# Altium PCB PCB1.PcbDoc
Units mm, origin at the board's own origin, x right, y up, seen from the top; angles counter-clockwise.
Board outline 100.25 x 100.25 mm, 2 copper layers (Top Layer, Bottom Layer); 86 components, 81 nets, 277 pads, 157 vias.
Unrouted connection lines stored in the file: 107.
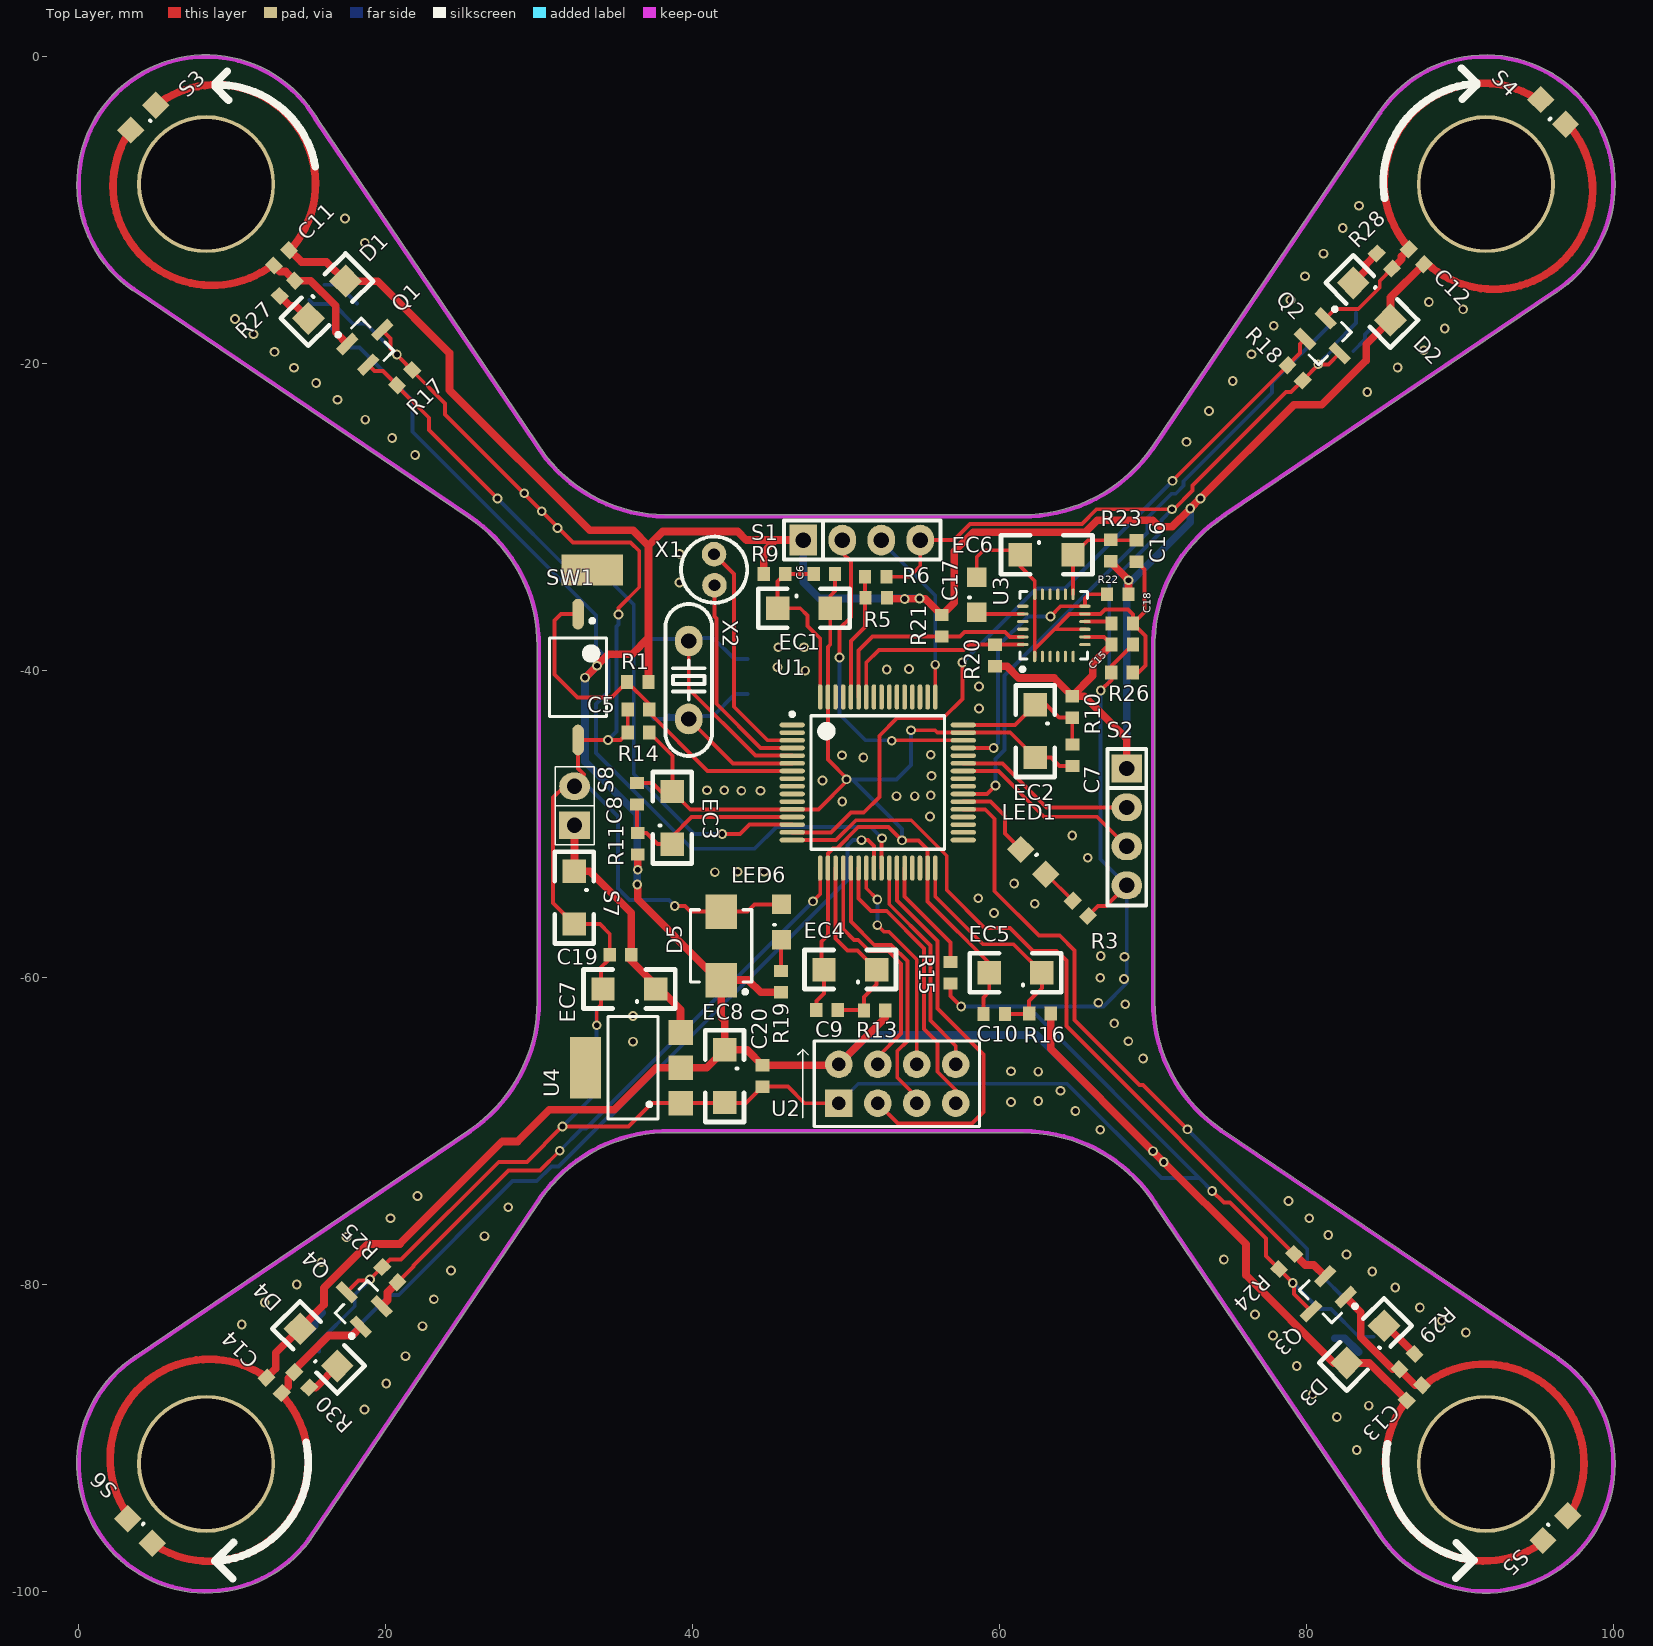
[diagram p0: Top Layer view]
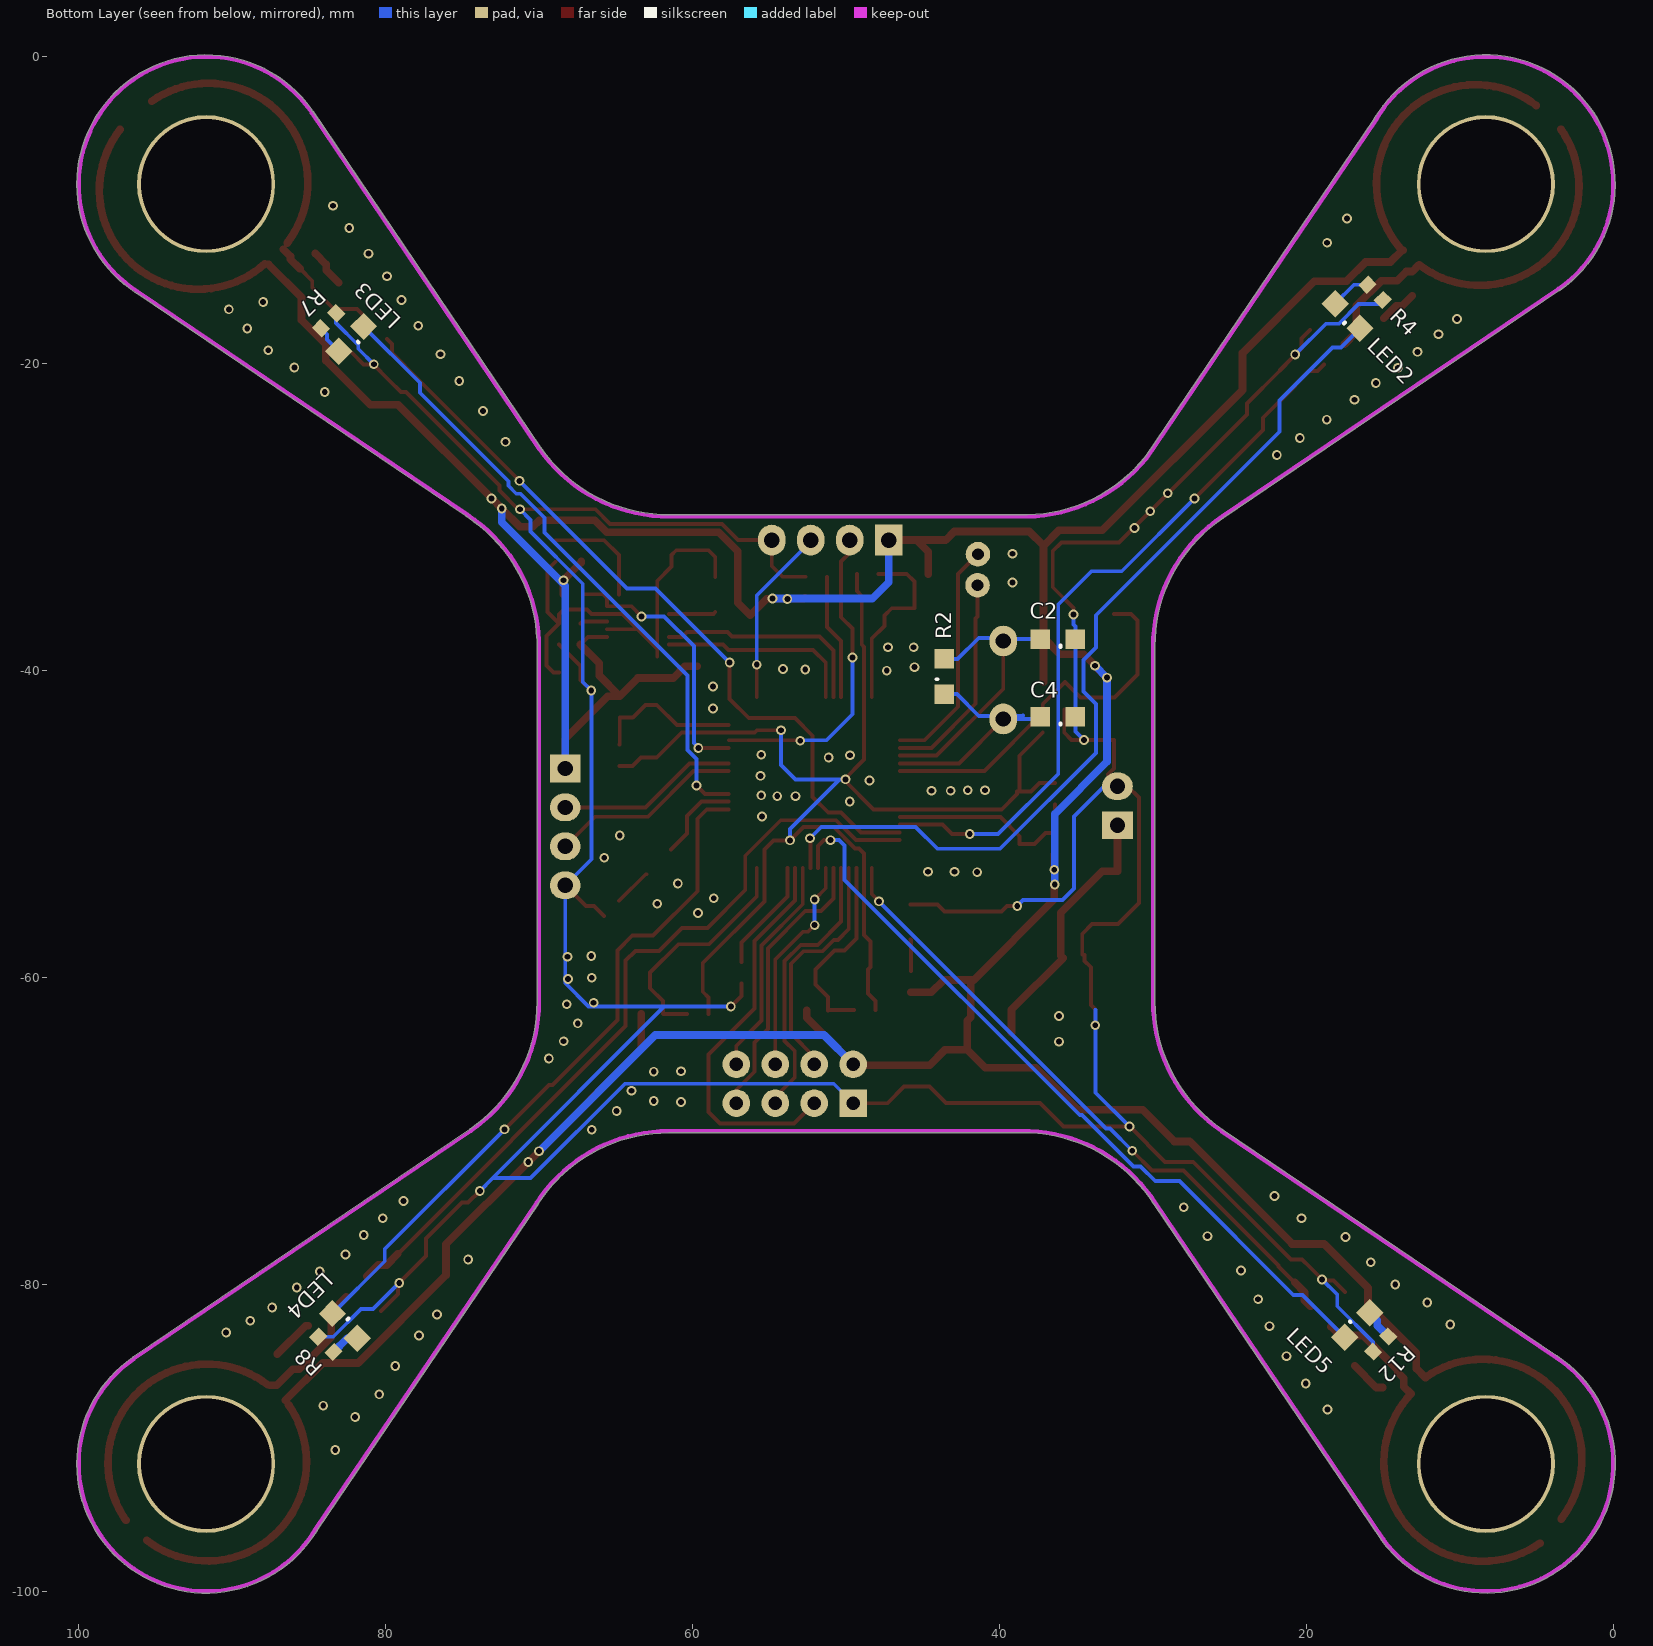
[diagram p1: Bottom Layer view, seen from below]

## Layer stack, top to bottom
Top Solder: solder mask 0.0102, Solder Resist, Dk 3.5
Top Layer: signal copper 0.0356
Dielectric1: dielectric 0.32, FR-4, Dk 4.8
Bottom Layer: signal copper 0.0356
Bottom Solder: solder mask 0.0102, Solder Resist, Dk 3.5

## Board outline
3.634,-84.682 ccw(c8.3,-91.7) 15.091,-96.69 ccw(c14.988,-96.615) 15.113,-96.641 29.915,-74.782 ccw(c29.833,-74.685) 29.94,-74.754 cw(c38.43,-80.223) 38.53,-70.124 ccw(c38.557,-70) 38.557,-70.127 61.519,-70.127 ccw(c61.544,-70.003) 61.545,-70.13 cw(c61.58,-80.229) 70.061,-74.747 ccw(c70.168,-74.678) 70.064,-74.751 84.458,-96 ccw(c84.581,-95.968) 84.472,-96.033 ccw(c91.7,-91.7) 100.127,-91.7 ccw(c91.7,-91.7) 96.501,-84.774 ccw(c96.391,-84.838) 96.463,-84.733 74.54,-69.915 ccw(c74.446,-70) 74.518,-69.895 cw(c80.227,-61.565) 70.128,-61.594 ccw(c70.001,-61.595) 70.127,-61.583 70.127,-38.613 ccw(c70.004,-38.582) 70.131,-38.582 ccw(c70.004,-38.582) 70.131,-38.581 cw(c80.229,-38.43) 74.733,-29.958 ccw(c74.663,-29.851) 74.762,-29.932 96.218,-15.413 ccw(c96.161,-15.299) 96.23,-15.407 ccw(c91.7,-8.3) 100.127,-8.3 ccw(c91.7,-8.3) 84.838,-3.408 ccw(c84.941,-3.482) 84.821,-3.524 ccw(c84.831,-3.651) 84.725,-3.58 69.937,-25.433 ccw(c69.991,-25.548) 69.886,-25.476 cw(c61.57,-19.746) 61.515,-29.845 ccw(c61.514,-29.972) 61.49,-29.847 38.775,-29.847 ccw(c38.747,-29.971) 38.743,-29.844 cw(c38.379,-19.752) 30.532,-26.108 ccw(c30.433,-26.188) 30.498,-26.079 15.573,-4.047 ccw(c15.454,-4.091) 15.564,-4.027 ccw(c8.3,-8.3) 3.484,-15.216 ccw(c3.557,-15.111) 3.52,-15.233 25.389,-30.033 ccw(c25.472,-29.937) 25.401,-30.043 cw(c19.777,-38.43) 29.876,-38.428 ccw(c30,-38.456) 29.873,-38.456 29.873,-61.519 ccw(c29.997,-61.544) 29.87,-61.545 cw(c19.771,-61.57) 29.87,-61.57 cw(c19.771,-61.57) 25.47,-69.907 ccw(c25.542,-70.012) 25.448,-69.926 3.656,-84.67 ccw(c3.704,-84.788)

## Design rules (kind name [scope] priority, off if disabled: settings)
Clearance [All] p1: gap=0.152
PolygonConnect [All] p1: connectstyle=Relief reliefconductorwidth=0.254 reliefentries=4 polygonreliefangle="90 Angle" airgapwidth=0.254
RoutingVias [All] p1: holewidth=0.711 width=1.27 viastyle="Through Hole" minholewidth=0.711 minwidth=1.27 maxholewidth=0.711 maxwidth=1.27
SilkToSolderMaskClearance SilkscreenOverComponentPads [IsPad] p1: minsilkscreentomaskgap=0.254 clearancetoexposedcopper=TRUE
SolderMaskExpansion [All] p1: expansion=0.102
Width Width_VCC [InNet('VCC' ,'BAT')] p1: maxlimit=0.7 minlimit=0.5 preferedwidth=0.5 minimp=50.000000 maximp=50.000000 favimp=50.000000
Width Width_ALL [All] p2: maxlimit=0.7 minlimit=0.254 preferedwidth=0.254 minimp=50.000000 maximp=50.000000 favimp=50.000000
28 further rules are at their usual default settings.

## Components (designator, comment, footprint, x,y, rotation, side; value= is the part's Value field where it differs from the comment)
C2 "22pF" 0805 36.22,-37.922 r0 bottom
C4 "22pF" 0805 36.22,-42.977 r0 bottom
C5 "104" 0603 36.474,-42.545 r180 top
C6 "104" 0603 48.59,-33.706 r0 top
C7 "104" 0603 64.77,-45.517 r270 top
C8 "104" 0603 36.373,-48.031 r90 top
C9 "104" 0603 48.768,-62.128 r180 top
C10 "104" 0603 59.665,-62.382 r180 top
C11 "104" 0603 13.208,-13.106 r45 top
C12 "104" 0603 87.173,-13.03 r315 top
C13 "104" 0603 87.046,-87.071 r225 top
C14 "104" 0603 12.725,-86.589 r135 top
C15 "104" 0603 68.007,-38.303 r0 top
C16 "106" 0603 68.936,-32.207 r90 top
C17 "104" 0805 58.547,-35.027 r90 top
C18 "104" 0603 68.007,-36.932 r0 top
C19 "104" 0603 35.306,-58.522 r180 top
C20 "104" 0603 44.552,-66.421 r270 top
D1 "IN4148" 1206 14.961,-17.043 r45 top
D2 "IN4148" 1206 83.058,-14.732 r315 top
D3 "IN4148" 1206 85.065,-82.702 r225 top
D4 "IN4148" 1206 16.84,-85.319 r135 top
D5 "SMBJ5.0A" DIOM4436X23N 41.859,-57.937 r270 top
EC1 "10uf" 1206 45.542,-35.941 r0 top
EC2 "10uf" 1206 62.332,-42.24 r270 top
EC3 "10uf" 1206 38.684,-51.308 r90 top
EC4 "10uf" 1206 51.994,-59.487 r180 top
EC5 "10uf" 1206 62.763,-59.69 r180 top
EC6 "10uF" 1206 61.366,-32.461 r0 top
EC7 "10uf" 1206 37.592,-60.757 r180 top
EC8 "10uf" 1206 42.088,-64.719 r270 top
LED1 "LED" 0805 62.205,-52.502 r315 top
LED2 "LED" 0805 17.31,-16.856 r45 bottom
LED3 "LED" 0805 82.288,-18.384 r315 bottom
LED4 "LED" 0805 82.659,-82.749 r225 bottom
LED5 "LED" 0805 16.642,-82.651 r135 bottom
LED6 "LED" 0805 45.822,-56.363 r90 top
Q1 "AO3416" SOT-23_N 18.974,-18.593 r45 top
Q2 "MOSFET-N" SOT-23_N 81.382,-18.517 r315 top
Q3 "MOSFET-N" SOT-23_N 81.102,-80.95 r225 top
Q4 "MOSFET-N" SOT-23_N 18.263,-81.305 r135 top
R1 "10K" 0603 36.424,-40.742 r0 top
R2 "RES" 0805 43.561,-40.361 r90 bottom
R3 "1K" 0603 65.278,-55.499 r315 top
R4 "1K" 0603 15.514,-15.347 r225 bottom
R5 "0R" 0603 51.968,-35.255 r0 top
R6 "20K" 0603 51.943,-33.884 r0 top
R7 "1K" 0603 83.724,-17.201 r135 bottom
R8 "1K" 0603 83.897,-83.916 r45 bottom
R9 "0R" 0603 45.339,-33.706 r0 top
R10 "0R" 0603 64.745,-42.367 r270 top
R11 "0R" 0603 36.424,-51.283 r90 top
R12 "1K" 0603 15.152,-83.889 r315 bottom
R13 "0R" 0603 51.867,-62.154 r180 top
R14 "0R" 0603 36.474,-44.044 r180 top
R15 "0R" 0603 56.82,-59.69 r90 top
R16 "0R" 0603 62.636,-62.357 r180 top
R17 "20K" 0603 21.234,-20.904 r45 top
R18 "20K" 0603 79.273,-20.599 r315 top
R19 "1K" 0603 45.771,-60.274 r90 top
R20 "3K" 0603 59.715,-39.014 r270 top
R21 "3K" 0603 56.236,-37.084 r90 top
R22 "3K" 0603 67.716,-35.027 r0 top
R23 "0R" 0603 67.259,-32.182 r270 top
R24 "20K" 0603 78.715,-78.511 r225 top
R25 "20K" 0603 20.269,-79.375 r135 top
R26 "0R" 0603 67.996,-40.132 r180 top
R27 "1K" 0603 13.589,-15.088 r225 top
R28 "1K" 0603 85.09,-13.31 r135 top
R29 "1K" 0603 86.563,-85.039 r45 top
R30 "1K" 0603 14.529,-86.233 r315 top
S1 "CON4" SIP4 47.219,-31.496 r0 top
S2 "CON4" SIP4 68.301,-46.38 r270 top
S3 "M0" 0805 4.166,-3.962 r225 top
S4 "M1" 0805 96.088,-3.556 r135 top
S5 "M2" 0805 96.266,-95.885 r45 top
S6 "M3" 0805 3.988,-96.114 r315 top
S7 "CON2" 1206 32.283,-53.086 r270 top
S8 "CON2" SIP2 32.309,-50.089 r90 top
SW1 "KEY2" SSOP2N 32.537,-40.437 r270 top
U1 "STM32F103RBT6" TSQFP50P1200X1200X160-64N 52.07,-47.295 r0 top
U2 "NRF24L01" CN8 49.53,-68.199 r90 top
U3 "MPU6050" QFN50P400X400X95_HS-25N 63.551,-37.059 r90 top
U4 "AMS1117" SOT223 36.119,-65.888 r90 top
X1 "32.768KHz" XTAL-50-2 41.427,-34.442 r90 top
X2 "8MHz" XTAL-200 39.751,-43.155 r90 top

## Footprints (in the part's own frame and the unit in brackets; to place one, negate y for a bottom-side part, rotate by r counter-clockwise, add the part's x,y. Pads: shape width x height; smd on the part's side, far side on the other; paste and mask are expansions set on the pad)
0603 [mm] "Chip Inductor, Body 0.6x0.3mm, IPC High Density"
  rect 0.8x0.9 smd: 1(-0.7,0) 2(0.7,0)
  body extent -0.87,-0.48 0.87,0.48, height 1.3
0805 [mil] "Chip Resistor; Body 2.0 x 1.3 mm (LxW typ)"
  rect 50x50 smd: 1(-46,1) 2(44,1)
  silkscreen extent -8,18 -8,21
1206 [mil]
  rect 60x60 smd: 1(0,0) 2(135,0)
  silkscreen extent -50,-50 185,50
CN8 [mm] "CN?"
  rect 1.8x1.8 hole 0.9: 1(0,0)
  round 1.8 hole 0.9: 2(2.54,0) 3(0,-2.54) 4(2.54,-2.54) 5(0,-5.08) 6(2.54,-5.08) 7(0,-7.62) 8(2.54,-7.62)
  silkscreen extent -1.52,-9.17 4.06,2.68
DIOM4436X23N [mm] "Molded Diode, 2-Leads, Body 4.4x3.6mm, IPC Medium Density"
  rect 2.25x2.05 smd: 1(-2.233,0) 2(2.233,0)
  silkscreen extent -2.35,-2 3.12,2, body extent -2.35,-1.97 2.35,1.97, height 2.3
QFN50P400X400X95_HS-25N [mm] "QFN, 24-Leads, Body 4.00x4.00mm, Pitch 0.50mm, Thermal Pad 2.68x2.60mm, IPC Medium Density"
  oval 0.75x0.2 smd: 1(-2.025,1.25) 2(-2.025,0.75) 3(-2.025,0.25) 4(-2.025,-0.25) 5(-2.025,-0.75) 6(-2.025,-1.25) 13(2.025,-1.25) 14(2.025,-0.75) 15(2.025,-0.25) 16(2.025,0.25) 17(2.025,0.75) 18(2.025,1.25)
  oval 0.2x0.75 smd: 7(-1.25,-2.025) 8(-0.75,-2.025) 9(-0.25,-2.025) 10(0.25,-2.025) 11(0.75,-2.025) 12(1.25,-2.025) 19(1.25,2.025) 20(0.75,2.025) 21(0.25,2.025) 22(-0.25,2.025) 23(-0.75,2.025) 24(-1.25,2.025)
  silkscreen extent -2.97,-2.2 2.2,2.2, body extent -2.05,-2.05 2.05,2.05, height 0.95
SIP2 [mm]
  rect 1.8x2 hole 1: 1(0,0)
  oval 1.8x2 hole 1: 2(2.54,0)
  silkscreen extent -1.27,-1.27 3.81,1.27
SIP4 [mm]
  rect 1.8x2 hole 1: 1(0,0)
  oval 1.8x2 hole 1: 2(2.54,0) 3(5.08,0) 4(7.62,0)
  silkscreen extent -1.27,-1.27 8.94,1.27
SOT223 [mm] "SOT-223/SC-73; 4 Leads; Body 6.7 x 7.3 mm, inc. leads (LxW max)"
  rect 1.6x1.6 smd: 1(-2.3,-3.1) 2(0,-3.1) 3(2.3,-3.1)
  rect 4x2 smd: 4(0,3.1)
  silkscreen extent -3.35,-1.62 3.35,1.63
SOT-23_N [mm] "SOT23, 3-Leads, Body 2.9x1.3mm, Pitch 0.95mm, Lead Span 2.5mm, IPC Medium Density"
  rect 1.5x0.6 smd: 1(-1.125,0.95) 2(-1.125,-0.95) 3(1.125,0)
  silkscreen extent -1.25,-1.5 0.7,1.92, body extent -0.7,-1.5 0.7,1.5, height 1.1
SSOP2N [mm] "SSOP, 2-Leads, Body 3.7x6.1mm (max), Pitch 0.00mm, IPC Medium Density"
  oval 2x0.75 smd: 1(-4.115,0) 2(4.089,0)
  silkscreen extent -3.8,-1.85 2.55,1.85, body extent -3.05,-1.85 3.05,1.85, height 2.5
TSQFP50P1200X1200X160-64N [mm] "TSQFP, 64-Leads, Body 12.0x12.0mm (max), Pitch 0.50mm, IPC Medium Density"
  oval 1.65x0.3 smd: 1(-5.575,3.75) 2(-5.575,3.25) 3(-5.575,2.75) 4(-5.575,2.25) 5(-5.575,1.75) 6(-5.575,1.25) 7(-5.575,0.75) 8(-5.575,0.25) 9(-5.575,-0.25) 10(-5.575,-0.75) 11(-5.575,-1.25) 12(-5.575,-1.75) 13(-5.575,-2.25) 14(-5.575,-2.75) 15(-5.575,-3.25) 16(-5.575,-3.75) 33(5.575,-3.75) 34(5.575,-3.25) 35(5.575,-2.75) 36(5.575,-2.25) 37(5.575,-1.75) 38(5.575,-1.25) 39(5.575,-0.75) 40(5.575,-0.25) 41(5.575,0.25) 42(5.575,0.75) 43(5.575,1.25) 44(5.575,1.75) 45(5.575,2.25) 46(5.575,2.75) 47(5.575,3.25) 48(5.575,3.75)
  oval 0.3x1.65 smd: 17(-3.75,-5.575) 18(-3.25,-5.575) 19(-2.75,-5.575) 20(-2.25,-5.575) 21(-1.75,-5.575) 22(-1.25,-5.575) 23(-0.75,-5.575) 24(-0.25,-5.575) 25(0.25,-5.575) 26(0.75,-5.575) 27(1.25,-5.575) 28(1.75,-5.575) 29(2.25,-5.575) 30(2.75,-5.575) 31(3.25,-5.575) 32(3.75,-5.575) 49(3.75,5.575) 50(3.25,5.575) 51(2.75,5.575) 52(2.25,5.575) 53(1.75,5.575) 54(1.25,5.575) 55(0.75,5.575) 56(0.25,5.575) 57(-0.25,5.575) 58(-0.75,5.575) 59(-1.25,5.575) 60(-1.75,5.575) 61(-2.25,5.575) 62(-2.75,5.575) 63(-3.25,5.575) 64(-3.75,5.575)
  silkscreen extent -5.7,-4.35 4.35,4.57, body extent -5,-5 5,5, height 1.6
XTAL-50-2 [mm]
  round 1.6 hole 0.762: 1(0,0) 2(2.032,0.025)
  rect 2x4 smd: 3(0.991,7.976)
  silkscreen extent -1.14,-2.13 3.17,2.18
XTAL-200 [mm]
  oval 2x1.8 hole 1: 1(0,0) 2(5.08,0)
  silkscreen extent -2.41,-1.52 7.49,1.52

## Part data
C2 C4 C5 C6 C7 C8 C9 C10 C11 C12 C13 C14 C15 C16 C17 C18 C19 C20: library part CAP
D1 D2 D3 D4: library part DIODE
EC1 EC2 EC3 EC4 EC5 EC6 EC7 EC8: library part EC
Q1: library part MOSFET-N, "N-Channel MOSFET"
Q2 Q3 Q4: "N-Channel MOSFET"
R1 R3 R4 R5 R6 R7 R8 R9 R10 R11 R12 R13 R14 R15 R16 R17 R18 R19 R20 R21 R22 R23 R24 R25 R26 R27 R28 R29 R30: library part RES
S3 S4 S5 S6: library part CON2
X1 X2: library part XTAL

## Free pads (board coordinates)
  round 9 hole 8.5: 0(8.3,-91.7) 0(8.3,-8.3) 0(91.7,-91.7) 0(91.7,-8.3)

## Via types
v1: diameter 0.635, hole 0.381, Top Layer to Bottom Layer, 157 vias

## Nets (pads, with @x,y where several pads share a name; then routed paths per layer and width w, separated by ;. In a path a pad name is that pad's centre, name@x,y a point inside that pad or via, vN(x,y) a via of type N, cw(c..) or ccw(c..) an arc to the next point about the centre after c; other vN are vias at no path point)
BAT: C19.1 EC7.1 S7.1 S8.1 U4.3 | length 17.1
  Top Layer w0.5: S8.1 32.309,-53.061 S7.1 33.299,-53.086 36.006,-55.793 C19.1 36.006,-58.587 35.854,-58.739 39.219,-62.104 U4.3
BOOT0: R5.1 R6.1 U1.60 | length 8.2
  Top Layer w0.254: U1.60 50.32,-38.072 51.243,-37.149 51.243,-35.255 R6.1
BOOT1: R15.2 U1.28 | length 7.4
  Top Layer w0.254: U1.28 53.82,-54.734 56.82,-57.734 R15.2
CE: U1.27 U2.3 | length 26
  Top Layer w0.254: U2.3 53.391,-69.52 58.217,-69.52 58.953,-68.783 58.953,-65.024 55.956,-62.027 55.956,-57.633 53.32,-54.996 U1.27
GND: C2.1 C4.1 C5.2 C15.2 C19.2 C20.2 D5.1 EC7.2 EC8.2 LED6.2 Q1.3 Q2.3 Q3.3 Q4.3 R3.2 R4.2 R6.2 R7.2 R8.2 R12.2 R14.2 R15.1 R17.2 R18.2 R24.2 R25.2 R26.2 S1.4 S2.4 S7.2 S8.2 SW1.2 U2.1 U4.1 | length 301.4
  Top Layer w0.254: Q4.3 18.221,-79.756 18.898,-79.756 R25.2 20.27,-78.384 21.006,-78.384 27.368,-72.022 29.197,-72.022 31.496,-69.723 v1(31.521,-69.723) 35.814,-69.723 37.349,-68.188 U4.1 43.485,-68.188 C20.2 46.217,-67.121 47.295,-68.199 U2.1 ; Q1.3 20.32,-18.348 20.32,-19 R17.2 21.729,-20.46 23.876,-22.607 23.876,-23.317 32.207,-31.648 35.966,-31.648 36.525,-32.207 36.525,-34.569 35.179,-35.916 v1(35.179,-36.347) ; v1@20.917,-19.647 R17.2@21.704,-20.435 ; S8.2 31.648,-47.549 30.912,-48.285 30.912,-55.143 S7.2 33.96,-56.515 34.606,-57.161 C19.2 ; 32.944,-46.787 32.537,-46.38 SW1.2 35.292,-44.526 R14.2 C5.2 ; v1(33.757,-63.119) 33.757,-62.128 33.731,-62.103 34.036,-61.798 34.036,-59.334 34.454,-58.917 C19.2@34.454,-58.522 ; v1(38.837,-55.347) 39.497,-55.347 39.855,-55.704 D5.1 43.584,-55.704 44.044,-55.245 LED6.2 ; R6.2 54.127,-33.884 54.839,-33.172 S1.4 57.036,-31.496 58.084,-30.448 65.374,-30.448 66.333,-29.489 v1(71.247,-29.489) 71.374,-29.489 72.593,-28.27 72.593,-27.94 78.676,-21.857 79.006,-21.857 R18.2 v1@80.797,-20.066 ; R15.1 56.82,-61.214 v1(57.506,-61.9) ; R3.2 66.42,-55.347 66.954,-55.347 S2.4 ; v1(66.599,-41.3) 67.296,-40.603 R26.2 67.296,-39.714 C15.2 ; v1(73.863,-73.914) 74.625,-74.676 75.032,-74.676 77.368,-77.013 77.368,-78.155 R24.2 79.197,-79.984 79.197,-80.636 Q3.3 ; v1@80.822,-20.041 81.449,-20.041 Q2.3
  Bottom Layer w0.254: R4.2 15.281,-16.104 16.586,-16.104 17.882,-17.399 18.72,-17.399 v1(20.726,-19.406) ; R12.2 15.647,-83.769 17.983,-81.432 17.983,-80.67 v1(18.974,-79.68) ; v1(31.521,-69.723) 33.731,-67.513 33.731,-62.103 33.757,-62.128 v1(33.757,-63.119) ; S8.2 33.172,-47.549 35.128,-49.505 35.128,-54.204 35.89,-54.966 38.456,-54.966 v1(38.837,-55.347) ; v1(34.493,-44.526) 35.052,-43.967 C4.1 C2.1 35.052,-37.135 35.179,-37.008 v1(35.179,-36.347) ; U2.1 50.8,-66.929 64.414,-66.929 70.561,-73.076 73.025,-73.076 ; v1(57.506,-61.9) 61.849,-61.9 ; v1(71.247,-29.489) 70.561,-30.175 70.561,-30.937 67.158,-34.341 67.158,-40.742 v1(66.599,-41.3) 66.599,-52.299 S2.4 68.301,-60.376 66.777,-61.9 61.849,-61.9 ; v1@73.939,-73.99 v1(73.863,-73.914) 73.025,-73.076 ; v1(79.121,-79.908) 80.823,-81.61 81.61,-81.61 83.421,-83.421 R8.2 ; v1(80.772,-20.041) 81.788,-19.025 81.788,-18.796 83.229,-17.355 R7.2 ; 61.849,-61.9 73.025,-73.076
  other v1: 83.287,-90.805 81.991,-88.646 18.618,-88.163 84.074,-87.909 80.416,-87.173 20.041,-86.462 79.375,-85.319 21.285,-84.684 77.826,-83.337 90.399,-83.134 22.403,-82.728 10.617,-82.626 88.824,-82.372 76.657,-81.966 87.401,-81.509 12.116,-81.178 23.139,-80.975 85.801,-80.213 14.199,-80.01 84.303,-79.172 24.257,-79.096 15.799,-78.562 74.625,-78.384 82.626,-78.054 17.45,-76.911 26.441,-76.86 81.432,-76.784 20.32,-75.692 80.188,-75.692 27.991,-74.981 78.842,-74.574 22.073,-74.244 66.573,-69.926 64.948,-68.707 60.757,-68.123 62.535,-68.047 63.983,-67.386 62.535,-66.142 60.757,-66.116 69.367,-65.278 36.119,-64.186 68.402,-64.16 67.488,-62.992 36.119,-62.509 68.199,-61.747 66.446,-61.646 68.123,-60.096 66.573,-60.02 68.148,-58.649 66.599,-58.598 59.639,-55.804 62.306,-55.194 58.623,-54.839 60.96,-53.873 41.453,-53.137 42.926,-53.111 44.653,-53.111 65.761,-52.197 64.745,-50.749 55.474,-49.505 49.759,-48.539 53.289,-48.184 54.483,-48.184 55.524,-48.133 43.18,-47.828 44.425,-47.828 40.945,-47.803 42.062,-47.803 48.463,-47.168 55.575,-46.863 51.13,-45.669 49.733,-45.517 55.524,-45.491 58.674,-42.469 58.674,-41.046 47.346,-40.005 52.654,-39.929 54.102,-39.903 45.542,-39.776 45.593,-38.481 47.269,-38.481 39.141,-34.265 39.141,-32.385 31.191,-30.709 30.175,-29.616 29.032,-28.448 21.92,-25.959 72.187,-25.095 20.422,-24.841 18.669,-23.647 73.66,-23.089 16.866,-22.352 83.972,-21.844 15.469,-21.26 75.209,-21.133 14.021,-20.269 85.954,-20.244 76.429,-19.38 12.751,-19.228 87.655,-19.126 11.379,-18.085 89.027,-17.704 77.876,-17.526 10.185,-17.094 90.221,-16.459 87.986,-15.977 78.969,-15.85 79.908,-14.3 81.128,-12.827 18.644,-12.116 82.372,-11.151 17.348,-10.541 83.439,-9.703
I2C_SCL: R20.1 U1.58 U3.24 | length 12.9
  Top Layer w0.254: U1.58 51.32,-39.485 52.146,-38.659 57.658,-38.659 58.008,-38.309 U3.24
I2C_SDA: R21.1 U1.59 U3.23 | length 14.4
  Top Layer w0.254: U1.59 50.82,-38.69 51.726,-37.784 R21.1 57.441,-37.784 57.734,-37.49 60.376,-37.49 60.694,-37.809 U3.23
INT1: R22.1 U1.45 U3.12 | length 17.6
  Top Layer w0.254: U1.45 v1(59.624,-45.045) ; v1(63.322,-36.474) 63.988,-35.809 U3.12 65.576,-35.288 65.837,-35.027 R22.1
  Bottom Layer w0.254: v1@59.588,-45.06 59.919,-44.729 59.919,-38.405 61.849,-36.474 v1(63.322,-36.474)
IRQ: U1.26 U2.8 | length 14.6
  Top Layer w0.254: U1.26 52.82,-55.233 55.499,-57.912 55.499,-62.814 57.15,-64.465 U2.8
M0: Q1.2 R17.1 U1.14 | length 47.6
  Top Layer w0.254: Q1.2 19.275,-20.485 19.825,-20.485 R17.1 20.739,-21.45 22.813,-23.524 22.813,-24.312 v1@27.33,-28.829 ; v1(41.935,-50.648) 43.104,-50.648 43.707,-50.045 U1.14
  Bottom Layer w0.254: v1(27.28,-28.778) 32.029,-33.528 34.011,-33.528 36.17,-35.687 36.17,-46.736 40.081,-50.648 v1(41.935,-50.648)
M1: Q2.2 R18.1 U1.15 | length 52.1
  Top Layer w0.254: U1.15 49.023,-50.545 50.317,-49.251 51.156,-49.251 52.172,-48.235 52.172,-44.247 53.315,-43.104 56.337,-43.104 57.582,-41.859 v1(57.582,-39.472) ; v1@71.197,-27.711 79.591,-19.317 ; R18.1 79.578,-19.305 79.578,-18.729 Q2.2
  Bottom Layer w0.254: v1(57.582,-39.472) 62.408,-34.646 64.262,-34.646 v1(71.272,-27.635)
M2: Q3.2 R24.1 U1.16 | length 51.4
  Top Layer w0.254: U1.16 49.361,-51.045 50.648,-49.759 54.254,-49.759 56.566,-52.07 56.566,-54.305 59.03,-56.769 60.681,-56.769 62.179,-58.268 63.729,-58.268 64.364,-58.903 64.364,-63.17 R24.1
  Top Layer w0.5: R24.1 79.933,-78.74 80.483,-78.74 Q3.2
M3: Q4.2 R25.1 U1.17 | length 42.6
  Top Layer w0.254: 20.155,-80.429 R25.1@20.739,-79.845 ; R25.1 21.806,-78.829 21.806,-78.778 28.003,-72.58 30.061,-72.58 v1(31.344,-71.298) ; v1(47.854,-55.042) 48.32,-54.575 U1.17
  Top Layer w0.5: Q4.2 20.117,-81.042 20.117,-80.517 R25.1
  Bottom Layer w0.254: v1(31.344,-71.298) 32.797,-69.844 33.051,-69.844 v1(47.854,-55.042)
NetC11_1: C11.1 Q1.1 R27.1 S3.2 | length 26.3
  Top Layer w0.5: S3.2@3.404,-4.724 ccw(c8.692,-8.437) C11.1@12.643,-13.549 ; C11.1 13.107,-13.995 13.487,-13.995 R27.1 15.101,-14.593 16.739,-16.231 16.739,-17.949 Q1.1
NetC12_1: C12.1 Q2.1 R28.1 S4.2 | length 26
  Top Layer w0.254: Q2.1 81.873,-16.434 83.388,-16.434 84.785,-15.037 84.785,-14.604 R28.1
  Top Layer w0.5: R28.1 86.208,-13.182 86.208,-13.005 C12.1 ; 86.426,-12.135 cw(c91.538,-8.184) S4.2@95.25,-2.896
NetC13_1: C13.1 Q3.1 R29.1 S5.2 | length 26.7
  Top Layer w0.5: Q3.1 83.557,-81.813 83.557,-83.455 85.636,-85.534 R29.1 87.11,-86.576 C13.1 ; C13.1@87.687,-86.553 cw(c91.638,-91.665) S5.2@96.926,-95.377
NetC14_1: C14.1 Q4.1 R30.1 S6.2 | length 26.4
  Top Layer w0.5: S6.2@4.775,-96.876 ccw(c8.488,-91.588) C14.1@13.168,-87.133 ; C14.1 13.64,-86.664 13.64,-86.132 R30.1 14.034,-85.585 16.281,-83.337 17.822,-83.337 Q4.1
NetC16_2: C16.2 EC6.2 R23.1 U3.13 | length 7.1
  Top Layer w0.254: U3.13 64.801,-32.467 65.76,-31.507 68.097,-31.507 C16.2
NetC17_1: C17.1 U3.20 | length 3.1
  Top Layer w0.254: C17.1 58.635,-36.309 U3.20
NetC18_1: C18.1 U3.10 | length 1.8
  Top Layer w0.254: U3.10 67.184,-36.809 C18.1
NetD1_1: D1.1 R27.2 | length 2.5
  Top Layer w0.5: R27.2 13.742,-16.231 14.148,-16.231 D1.1
NetD2_1: D2.1 R28.2 | length 2.6
  Top Layer w0.5: D2.1 83.871,-13.919 83.871,-13.539 R28.2
NetD3_1: D3.1 R29.2 | length 2.8
  Top Layer w0.5: D3.1 85.216,-82.702 R29.2
NetD4_1: D4.1 R30.2 | length 2.4
  Top Layer w0.5: R30.2 15.431,-86.728 D4.1
NetLED1_2: LED1.2 R3.1 | length 2.5
  Top Layer w0.254: LED1.2 63.053,-53.274 R3.1
NetLED2_2: LED2.2 R4.1 | length 2.6
  Bottom Layer w0.254: R4.1 16.887,-14.852 LED2.2
NetLED3_2: LED3.2 R7.1 | length 2
  Bottom Layer w0.254: LED3.2 83.82,-18.432 83.82,-18.095 R7.1
NetLED4_2: LED4.2 R8.1 | length 1.9
  Bottom Layer w0.5: LED4.2 82.512,-83.521 R8.1
NetLED5_2: LED5.2 R12.1 | length 2.1
  Bottom Layer w0.5: R12.1 15.367,-82.684 15.367,-82.346 LED5.2
NetLED6_1: LED6.1 R19.2 | length 2.1
  Top Layer w0.254: R19.2 45.771,-57.556 LED6.1
PA04: U1.20 U2.4 | length 15.9
  Top Layer w0.254: U1.20 49.82,-56.856 50.521,-57.556 50.8,-57.556 51.537,-58.293 52.781,-58.293 53.594,-59.106 53.594,-63.652 52.07,-65.176 U2.4
PA05: U1.21 U2.5 | length 18.3
  Top Layer w0.254: U1.21 50.32,-56.365 51.841,-57.887 52.95,-57.887 54,-58.937 54,-64.135 53.34,-64.795 53.34,-66.523 54.61,-67.793 U2.5
PA06: U1.22 U2.7 | length 18.5
  Top Layer w0.254: U1.22 50.82,-54.859 51.638,-55.677 52.654,-55.677 55.093,-58.115 55.093,-63.373 55.971,-64.251 55.971,-66.148 57.15,-67.327 U2.7
PA07: U1.23 U2.6 | length 14.3
  Top Layer w0.254: U1.23 51.32,-54.19 v1(52.045,-54.915) ; v1(52.045,-56.591) 52.476,-57.023 52.807,-57.023 54.61,-58.826 U2.6
  Bottom Layer w0.254: v1(52.045,-56.591) v1(52.045,-54.915)
PA08: U1.41
PA09: S2.3 U1.42 | length 12.7
  Top Layer w0.254: U1.42 59.931,-46.545 62.916,-49.53 66.37,-49.53 S2.3
PA10: S2.2 U1.43 | length 11.8
  Top Layer w0.254: U1.43 60.193,-46.045 63.068,-48.92 S2.2
PA11: U1.44
PA13: S1.2 U1.46 | length 20.7
  Top Layer w0.254: v1(49.581,-39.141) 49.581,-37.262 50.317,-36.525 50.317,-32.893 49.759,-32.334 S1.2 ; v1@52.984,-44.545 U1.46
  Bottom Layer w0.254: v1(49.581,-39.141) 49.581,-42.85 51.276,-44.545 v1@52.984,-44.545
  other v1: 52.984,-44.577
PA14: S1.3 U1.49 | length 11.7
  Top Layer w0.254: v1@55.804,-39.599 v1(55.82,-39.615) U1.49
  Bottom Layer w0.254: S1.3 52.299,-31.598 55.82,-35.119 v1(55.82,-39.615)
PA15: U1.50
PB03: U1.55
PB04: U1.56
PB05: U1.57
PB08: U1.61
PB09: U1.62
PB10: U1.29
PB11: U1.30
PB12: U1.33
PB13: U1.34
PB14: U1.35
PB15: U1.36
PC00: U1.8
PC01: U1.9
PC02: U1.10
PC03: U1.11
PC04: LED5.1 U1.24 | length 50.7
  Top Layer w0.254: v1(51.003,-51.054) 51.435,-51.054 51.82,-51.439 U1.24
  Bottom Layer w0.254: LED5.1 20.25,-80.696 20.853,-80.696 28.27,-73.279 29.845,-73.279 30.81,-72.314 31.27,-72.314 34.607,-68.977 34.763,-68.977 50.089,-53.651 50.089,-51.41 50.444,-51.054 v1(51.003,-51.054)
PC05: LED2.1 U1.25 | length 60
  Top Layer w0.254: U1.25 52.32,-50.956 v1(52.349,-50.927) v1@52.527,-50.927
  Bottom Layer w0.254: LED2.1 17.751,-18.948 18.288,-18.948 21.742,-22.403 21.742,-24.435 33.706,-36.398 33.706,-38.506 34.519,-39.319 34.519,-41.377 33.706,-42.189 33.706,-45.364 39.954,-51.613 44.044,-51.613 45.466,-50.19 51.613,-50.19 v1(52.349,-50.927)
PC06: LED4.1 U1.37 | length 45.3
  Top Layer w0.254: U1.37 59.078,-49.045 59.69,-49.657 59.69,-54.381 62.586,-57.277 63.932,-57.277 64.897,-58.242 64.897,-62.763 69.139,-67.005 69.367,-67.005 v1(72.263,-69.901)
  Bottom Layer w0.254: v1(72.263,-69.901) 80.061,-77.699 80.061,-78.498 LED4.1
PC07: LED1.1 U1.38 | length 5.7
  Top Layer w0.254: U1.38 59.416,-48.545 60.35,-49.479 60.35,-50.612 LED1.1
PC08: LED3.1 U1.39 | length 41.4
  Top Layer w0.254: U1.39 59.194,-48.045 v1(59.741,-47.498)
  Bottom Layer w0.254: v1(59.741,-47.498) 59.741,-45.773 60.325,-45.188 60.325,-40.316 69.65,-30.991 69.65,-30.039 71.216,-28.473 71.488,-28.473 72.009,-27.953 72.009,-27.661 77.775,-21.895 77.775,-21.245 LED3.1
PC09: U1.40
PC10: U1.51
PC11: U1.52
PC12: U1.53
PC13: U1.2
PC14: U1.3 X1.2 | length 15.6
  Top Layer w0.254: X1.2 42.691,-33.699 42.691,-42.36 44.875,-44.545 U1.3 ; X1.2@41.529,-31.75 X1.2@41.796,-32.017
PC15: U1.4 X1.1 | length 14.6
  Top Layer w0.254: X1.1 41.427,-36.474 41.554,-36.601 41.554,-42.164 44.435,-45.045 U1.4 ; X1.1@41.554,-34.442 X1.1@41.554,-33.782
PD00: C2.2 R2.2 U1.5 X2.2 | length 18.5
  Top Layer w0.254: X2.2 39.751,-41.199 44.097,-45.545 U1.5
  Bottom Layer w0.254: C2.2 39.624,-37.948 X2.2 ; X2.2@39.751,-37.871 41.351,-37.871 42.723,-39.243 R2.2
PD01: C4.2 R2.1 U1.6 X2.1 | length 16.1
  Top Layer w0.254: X2.1 42.641,-46.045 U1.6
  Bottom Layer w0.254: C4.2 37.49,-43.155 X2.1 ; 38.456,-42.926 38.481,-42.951 41.351,-42.951 42.774,-41.529 R2.1
PD02: U1.54
RESETN: C5.1 R1.1 SW1.1 U1.7 | length 24.5
  Top Layer w0.254: SW1.1 31.42,-36.322 31.013,-36.728 31.013,-40.259 32.512,-41.758 34.708,-41.758 R1.1 37.174,-42.192 C5.1 37.174,-42.737 40.982,-46.545 U1.7
VBAT: U1.1
VCC: C11.2 C12.2 C13.2 C14.2 C15.1 C20.1 D1.2 D2.2 D3.2 D4.2 D5.2 EC8.1 R1.2 R5.2 R9.1 R10.1 R11.1 R13.1 R16.1 R19.1 R20.2 R21.2 R22.2 R23.2 S1.1 S2.1 S3.1 S4.1 S5.1 S6.1 U2.2 U3.8 U4.2 | length 382.1
  Top Layer w0.254: U3.8 66.812,-37.809 C15.1
  Top Layer w0.5: S6.1@3.393,-95.295 cw(c8.505,-91.343) C14.2@12.217,-86.055 ; S3.1@5.015,-3.168 cw(c8.966,-8.28) C11.2@13.763,-12.609 ; C14.2 12.84,-85.484 12.84,-84.469 D4.2 15.977,-81.333 15.977,-80.239 18.847,-77.368 20.93,-77.368 27.61,-70.688 28.6,-70.688 30.658,-68.631 34.9,-68.631 37.643,-65.888 U4.2 40.919,-65.888 EC8.1 ; C11.2 13.754,-12.611 14.516,-13.373 16.14,-13.373 D1.2 19.47,-14.619 24.155,-19.304 24.155,-21.717 33.299,-30.861 36.119,-30.861 37.124,-31.866 ; v1(32.995,-40.462) 34.519,-38.938 36.057,-38.938 37.124,-37.871 ; v1@36.424,-53.95 36.424,-54.915 41.679,-60.17 D5.2 ; v1(36.424,-52.984) R11.1 ; R1.2 37.124,-37.871 ; R9.1 44.639,-32.247 45.39,-31.496 ; R19.1 44.439,-60.974 43.635,-60.17 D5.2 ; S1.1 45.39,-31.496 ; R13.1 52.567,-62.622 U2.2 49.468,-65.721 C20.1 43.55,-64.719 EC8.1 ; R5.2 52.73,-35.317 55.169,-35.317 R21.2 57.048,-35.571 57.048,-32.233 58.303,-30.978 65.593,-30.978 66.37,-30.201 69.977,-30.201 70.409,-30.632 71.249,-30.632 v1(72.441,-29.439) v1(72.441,-29.439) v1(73.101,-28.778) 79.197,-22.682 81.001,-22.682 83.896,-19.787 83.896,-18.743 D2.2 85.483,-15.685 87.642,-13.525 C12.2 ; R20.2 60.492,-39.714 61.265,-40.488 63.565,-40.488 R10.1 ; R16.1 63.336,-64.657 v1(70.002,-71.323) v1(70.714,-72.034) 76.073,-77.394 76.073,-79.4 81.8,-85.127 D3.2 84.112,-85.127 C13.2 ; R23.2 67.259,-32.955 v1(68.416,-34.112) R22.2 ; C15.1 66.091,-39.519 66.091,-40.321 R10.1 ; S2.1@68.301,-46.101 68.301,-44.45 65.518,-41.667 R10.1 ; C13.2@86.335,-87.859 ccw(c91.623,-91.571) S5.1@95.574,-96.683 ; C12.2@87.873,-13.483 ccw(c92.202,-8.687) S4.1@97.314,-4.736 ; 37.124,-37.871 37.124,-31.866 ; 37.124,-31.866 38.052,-30.937 42.951,-30.937 43.51,-31.496 45.39,-31.496 ; D5.2 41.859,-62.586 42.088,-62.814 EC8.1
  Bottom Layer w0.5: v1(33.769,-39.688) v1(32.995,-40.462) 32.995,-45.949 36.398,-49.352 v1(36.398,-53.95) ; S1.1 47.219,-34.239 48.285,-35.306 v1(54.788,-35.306) ; U2.2 51.435,-63.754 62.433,-63.754 v1(70.002,-71.323) ; S2.1 68.301,-34.468 72.441,-30.328 v1(72.441,-29.439)
  other v1: 53.823,-35.331
VDD1: C6.1 EC1.1 R9.2 U1.64 | length 12.1
  Top Layer w0.254: C6.1 R9.2 45.542,-34.203 EC1.1 47.015,-35.941 47.498,-36.424 47.498,-37.084 48.32,-37.906 U1.64
VDD2: C9.1 EC4.1 R13.2 U1.19 | length 12.8
  Top Layer w0.254: U1.19 49.32,-57.473 50.089,-58.242 50.749,-58.242 EC4.1 51.994,-60.452 51.167,-61.279 R13.2 51.141,-62.128 C9.1
VDD3: C10.1 EC5.1 R16.2 U1.32 | length 15.4
  Top Layer w0.254: U1.32 55.82,-54.728 58.928,-57.836 60.909,-57.836 EC5.1 62.763,-60.706 61.936,-61.533 R16.2 61.911,-62.382 C10.1
VDD4: C7.1 EC2.1 R10.2 U1.48 | length 9.7
  Top Layer w0.254: U1.48 61.027,-43.545 EC2.1 63.068,-42.24 63.895,-43.067 R10.2 64.745,-44.791 C7.1
VDD5: C8.1 EC3.1 R11.2 U1.13 | length 13.3
  Top Layer w0.254: C8.1 36.373,-50.532 R11.2 36.994,-50.583 37.719,-51.308 EC3.1 38.684,-50.8 39.939,-49.545 U1.13
VSS: C6.2 C7.2 C8.2 C9.2 C10.2 EC1.2 EC2.2 EC3.2 EC4.2 EC5.2 R14.1 U1.12 U1.18 U1.31 U1.47 U1.63 | length 88.5
  Top Layer w0.254: C8.2 37.4,-47.331 37.948,-47.879 EC3.2 38.684,-45.553 R14.1 ; EC3.2@38.849,-47.879 38.849,-48.044 39.85,-49.045 U1.12 48.212,-49.045 50.14,-47.117 48.82,-45.797 U1.63 48.82,-38.456 48.971,-38.304 EC1.2 48.971,-35.128 49.29,-34.809 C6.2 ; C9.2 48.068,-61.533 48.565,-61.036 EC4.2 48.406,-59.328 48.406,-57.659 48.82,-57.245 U1.18 48.82,-51.916 49.149,-51.587 49.403,-51.587 50.8,-50.19 52.781,-50.19 v1(53.657,-51.067) 54.724,-51.067 55.32,-51.662 U1.31 55.32,-55.041 59.334,-59.055 EC5.2 59.334,-60.935 58.965,-61.304 C10.2 ; v1(54.229,-43.891) 55.804,-43.891 55.957,-44.045 U1.47 60.707,-44.045 EC2.2 63.373,-45.669 63.921,-46.217 C7.2
  Bottom Layer w0.254: v1(50.038,-47.092) 50.419,-47.092 ; v1(53.657,-51.067) 53.657,-50.33 50.419,-47.092 ; v1(54.229,-43.891) 54.229,-46.152 53.289,-47.092 50.419,-47.092
VSS1: C16.1 C17.2 C18.2 EC6.1 R26.1 U3.1 U3.9 U3.11 U3.18 | length 30.3
  Top Layer w0.254: C17.2 58.522,-32.588 58.953,-32.156 61.062,-32.156 EC6.1 61.366,-33.223 62.301,-34.158 U3.18 62.301,-38.584 ; U3.1 62.301,-38.584 ; U3.9 63.576,-37.309 ; R26.1 69.06,-40.132 69.52,-39.672 69.52,-37.744 C18.2 ; C16.1 69.444,-33.415 69.444,-36.195 C18.2 ; 62.301,-38.584 63.576,-37.309 ; 63.576,-37.309 64.576,-36.309 U3.11 66.587,-36.309 66.878,-36.017 68.377,-36.017 68.707,-36.347 C18.2
pads on no net: U3.2 U3.3 U3.4 U3.5 U3.6 U3.7 U3.14 U3.15 U3.16 U3.17 U3.19 U3.21 U3.22 U4.4 X1.3

## Keep-outs
Keep-Out Layer:
  lines w0.254: 3.557,-15.111 cw(c8.3,-8.3) 15.454,-4.091 ; 3.56,-15.107 25.473,-29.936 ; 3.704,-84.788 ccw(c8.3,-91.7) 14.988,-96.615 ; 3.706,-84.791 25.544,-70.015 ; 14.981,-96.609 29.829,-74.683 ; 15.451,-4.093 30.434,-26.213 ; 25.472,-29.937 cw(c19.777,-38.43) 30.003,-38.456 ; 25.542,-70.012 ccw(c19.771,-61.57) 29.997,-61.544 ; 29.833,-74.685 cw(c38.43,-80.223) 38.579,-69.998 ; 30,-61.544 30,-38.456 ; 30.433,-26.188 ccw(c38.379,-19.752) 38.747,-29.971 ; 38.557,-70 61.544,-70 ; 38.747,-29.975 61.514,-29.975 ; 61.514,-29.972 ccw(c61.57,-19.746) 69.991,-25.548 ; 61.544,-70.003 cw(c61.58,-80.229) 70.168,-74.678 84.587,-95.964 ; 69.999,-25.569 84.831,-3.651 ; 70,-38.582 70,-61.595 ccw(c80.227,-61.565) 74.446,-70 ; 70.004,-38.582 cw(c80.229,-38.43) 74.663,-29.851 ; 74.444,-70.003 96.391,-84.838 ; 74.66,-29.846 96.16,-15.298 ; 84.581,-95.968 ccw(c91.7,-91.7) 96.385,-84.848 ; 84.941,-3.482 cw(c91.7,-8.3) 96.161,-15.299

## Silkscreen, mask and mechanical layers (free items; w line width, h text height)
Top Overlay:
  lines w0.254: 8.893,-1.959 8.893,-1.828 8.893,-1.724
  lines w0.5: 8.893,-1.959 9.754,-2.819 ; 8.893,-1.828 cw(c9.055,-8.287) 15.418,-7.163 ; 8.893,-1.724 9.677,-0.94 ; 10.033,-99.187 8.895,-98.049 8.874,-98.049 ; 10.084,-96.825 8.874,-98.035 8.874,-98.049 ; 14.819,-90.284 cw(c8.493,-91.599) 8.874,-98.049 ; 85.095,-9.21 cw(c91.474,-8.184) 91.107,-1.733 ; 85.288,-90.385 ccw(c91.639,-91.571) 90.932,-97.993 90.907,-97.993 ; 89.738,-99.162 90.907,-97.993 ; 89.764,-96.85 90.907,-97.993 ; 90.119,-0.737 91.082,-1.699 91.107,-1.699 91.107,-1.733 ; 90.17,-2.769 91.107,-1.831 91.107,-1.733